# EAGLE board AnalogI_3_3V_LevelShift (EAGLE 7.6.0)
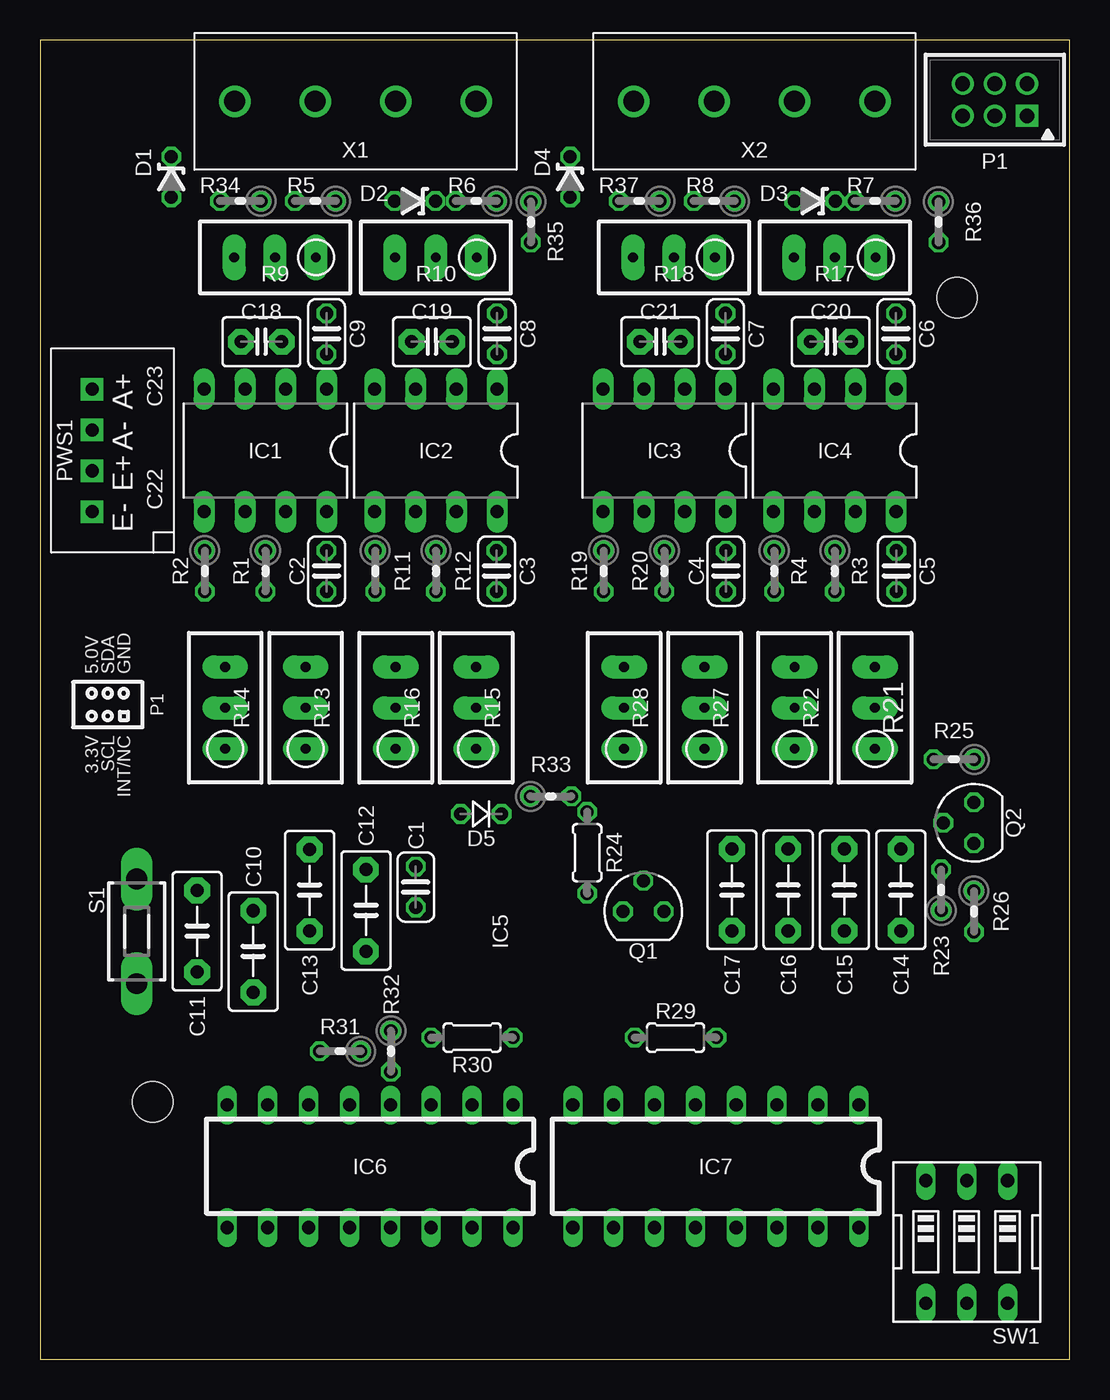
[diagram p0: board, top side]
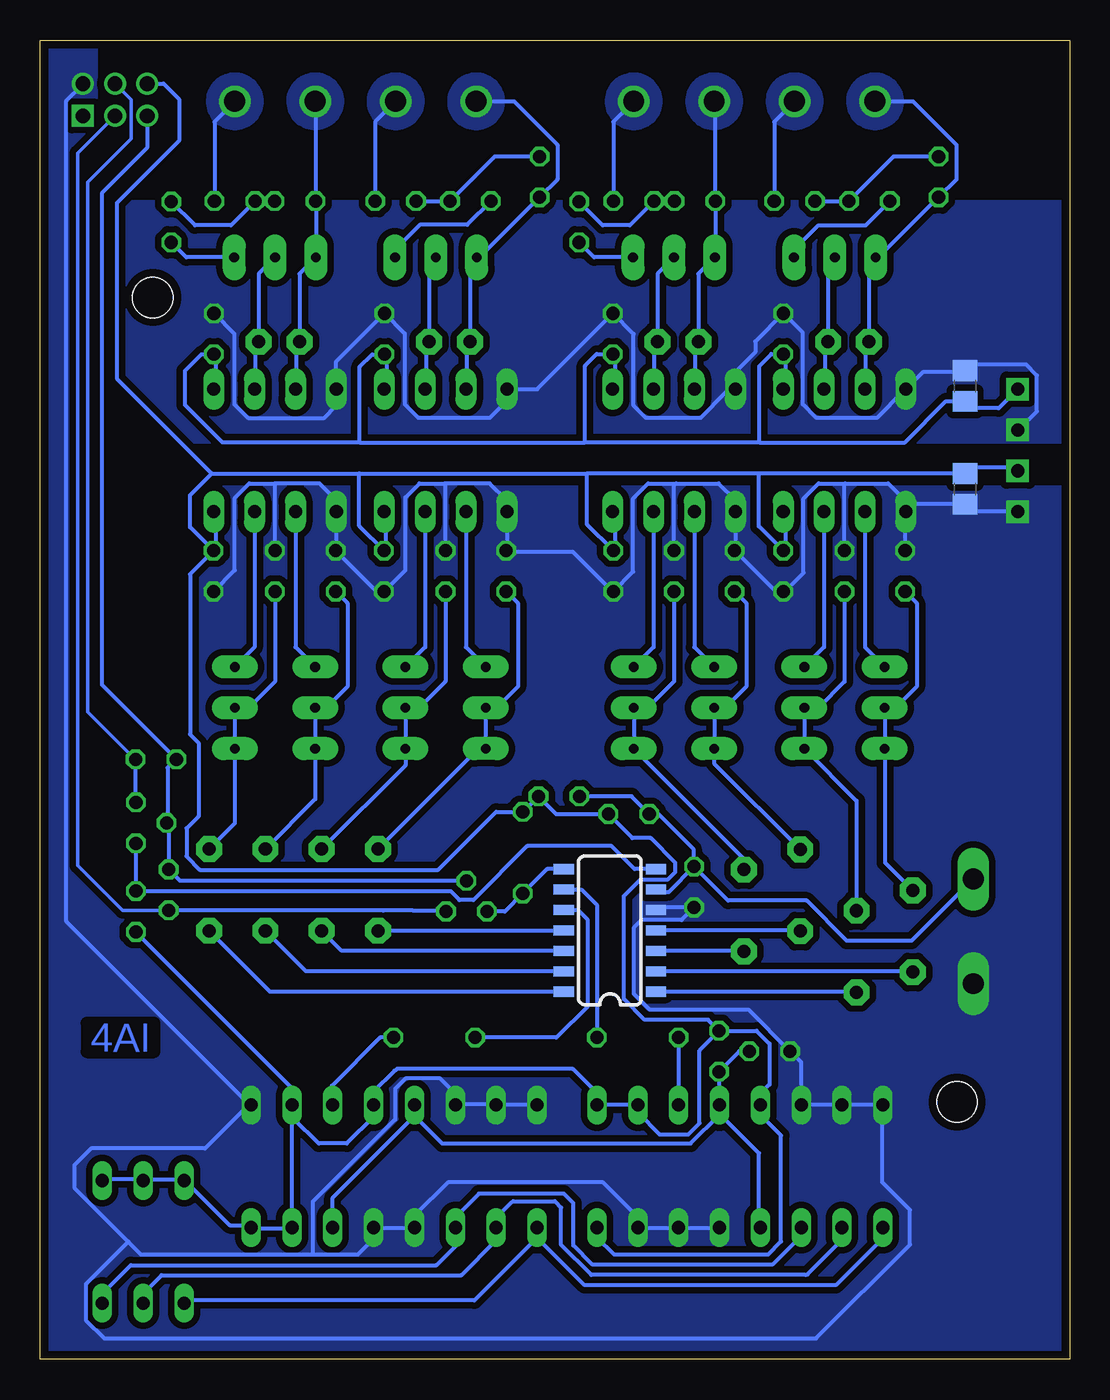
[diagram p1: board, bottom side, seen from below]

Size 64 x 82 mm. Coordinates in mm from the lower left corner, seen from the top.
Outline: 0,0 64,0 64,82 0,82 0,0
Copper layers (1*16): Top 0.035mm / dielectric 1.6mm / Bottom 0.035mm
Design rules "Elecrow": minimum track width 6mil, minimum drill 12mil, track to track 6mil, track to pad 6mil, pad to pad 6mil, via to via 8mil, smd to smd 0mil, copper to edge 20mil, drill to drill 10mil, minimum pad ring 6mil, minimum via ring 6mil, stop-mask expansion 0mil, vias tented up to drill 100mil, thermal gap 10mil
Holes 2.5 mm at 7,16 57,66

## Footprints (pad centres in the part's own frame; a part is rotated, then mirrored left to right if it is on the bottom)
C025-024X044 = drill 0.813 octagon: 1 -1.27,0; 2 1.27,0
C5B3 = drill 0.813 pad 1.6 octagon: 1 -2.54,0; 2 2.54,0
C2.5-3 = drill 0.813 pad 1.6 octagon: 1 -1.27,0; 2 1.27,0
C0805 = smd 1.3 x 1.5: 1 -0.95,0; 2 0.95,0
ZDIO-2.5 = drill 0.813 octagon: A 1.27,0; C -1.27,0
DO35-2V = drill 0.813 octagon: A 1.27,0; C -1.27,0
DIL08 = drill 0.813 pad 1.3 long: 1 -3.81,-3.81; 2 -1.27,-3.81; 3 1.27,-3.81; 4 3.81,-3.81; 5 3.81,3.81; 6 1.27,3.81; 7 -1.27,3.81; 8 -3.81,3.81
14LDSOIC = smd 1.27 x 0.635: 1 -2.87,3.81; 2 -2.87,2.54; 3 -2.87,1.27; 4 -2.87,0; 5 -2.87,-1.27; 6 -2.87,-2.54; 7 -2.87,-3.81; 8 2.87,-3.81; 9 2.87,-2.54; 10 2.87,-1.27; 11 2.87,0; 12 2.87,1.27; 13 2.87,2.54; 14 2.87,3.81
DIL16 = drill 0.813 long: 1 -8.89,-3.81; 2 -6.35,-3.81; 3 -3.81,-3.81; 4 -1.27,-3.81; 5 1.27,-3.81; 6 3.81,-3.81; 7 6.35,-3.81; 8 8.89,-3.81; 9 8.89,3.81; 10 6.35,3.81; 11 3.81,3.81; 12 1.27,3.81; 13 -1.27,3.81; 14 -3.81,3.81; 15 -6.35,3.81; 16 -8.89,3.81
DF11-06DP-2DSA = drill 0.914 square: 1 2,-1 | drill 0.914: 2 2,1; 3 0,-1; 4 0,1; 5 -2,-1; 6 -2,1
TMEXXXXS = drill 0.813 pad 1.397 square: 1 -3.81,1.27; 2 -1.27,1.27; 3 1.27,1.27; 4 3.81,1.27
SOT54E = drill 0.813 octagon: D -1.27,0; G 0,1.905; S 1.27,0
0204V = drill 0.813 octagon: 1 -1.27,0; 2 1.27,0
RTRIM3296W = drill 0.61 pad 1.422 long: 1 0,-2.54; 2 0,0; 3 0,2.54
0204/5 = drill 0.813 octagon: 1 -2.54,0; 2 2.54,0
DTS-3 = drill 1.3 long: 1 -3.25,0; 2 3.25,0
EDG-03 = drill 0.813 long: 1 -2.54,-3.81; 2 0,-3.81; 3 2.54,-3.81; 4 2.54,3.81; 5 0,3.81; 6 -2.54,3.81
691131710004 = drill 1.3: 1 -7.5,0; 2 -2.5,0; 3 2.5,0; 4 7.5,0

## Placement (x,y rotation side)
C1  100nF  [C025-024X044]  23.35,29.36 270 top
C2  100nF  [C025-024X044]  17.8,49 90 top
C3  100nF  [C025-024X044]  28.37,49 90 top
C4  100nF  [C025-024X044]  42.63,49 90 top
C5  100nF  [C025-024X044]  53.23,49 90 top
C6  100nF  [C025-024X044]  53.2,63.75 90 top
C7  100nF  [C025-024X044]  42.6,63.75 90 top
C8  100nF  [C025-024X044]  28.4,63.75 90 top
C9  100nF  [C025-024X044]  17.8,63.75 90 top
C10  100nF  [C5B3]  13.25,25.35 90 top
C11  100nF  [C5B3]  9.75,26.61 90 top
C12  100nF  [C5B3]  20.25,27.9 90 top
C13  100nF  [C5B3]  16.75,29.16 90 top
C14  100nF  [C5B3]  53.5,29.18 270 top
C15  100nF  [C5B3]  50,29.18 270 top
C16  100nF  [C5B3]  46.5,29.18 270 top
C17  100nF  [C5B3]  43,29.18 270 top
C18  10nF  [C2.5-3]  13.75,63.25 0 top
C19  10nF  [C2.5-3]  24.35,63.25 0 top
C20  10nF  [C2.5-3]  49.15,63.25 0 top
C21  10nF  [C2.5-3]  38.55,63.25 0 top
C22  4.7uF  [C0805]  6.5,54.1 270 bottom
C23  10uF  [C0805]  6.5,60.5 270 bottom
D1  10V  [ZDIO-2.5]  8.15,73.5 270 top
D2  10V  [ZDIO-2.5]  23.3,72 180 top
D3  10V  [ZDIO-2.5]  48.16,72 180 top
D4  10V  [ZDIO-2.5]  32.95,73.5 270 top
D5  1N4148DO35-2V  [DO35-2V]  27.41,33.9 180 top
IC1  HCPL-7800  [DIL08]  14,56.5 180 top
IC2  HCPL-7800  [DIL08]  24.6,56.5 180 top
IC3  HCPL-7800  [DIL08]  38.8,56.5 180 top
IC4  HCPL-7800  [DIL08]  49.4,56.5 180 top
IC5  MCP3424SOIC  [14LDSOIC]  28.59,26.66 180 bottom
IC6  74HC4051_MUXN  [DIL16]  20.5,12 180 top
IC7  74HC4051_MUXN  [DIL16]  42,12 180 top
P1  DF11-06-2DSA  [DF11-06DP-2DSA]  59.35,78.3 0 top
PWS1  TME_0505S  [TMEXXXXS]  4.5,56.5 90 top
Q1  BS170  [SOT54E]  37.5,27.84 0 top
Q2  BS170  [SOT54E]  58.05,33.35 90 top
R1  1K  [0204V]  14,49 270 top
R2  1K  [0204V]  10.23,49 270 top
R3  1K  [0204V]  49.4,49 270 top
R4  1K  [0204V]  45.63,49 270 top
R5  1K2  [0204V]  17.1,72 180 top
R6  1K2  [0204V]  27.1,72 180 top
R7  1K2  [0204V]  51.9,72 180 top
R8  1K2  [0204V]  41.9,72 180 top
R9  1K  [RTRIM3296W]  14.6,68.5 90 top
R10  1K  [RTRIM3296W]  24.6,68.5 90 top
R11  1K  [0204V]  20.83,49 270 top
R12  1K  [0204V]  24.6,49 270 top
R13  1K  [RTRIM3296W]  16.5,40.5 0 top
R14  1K  [RTRIM3296W]  11.5,40.5 0 top
R15  1K  [RTRIM3296W]  27.1,40.5 0 top
R16  1K  [RTRIM3296W]  22.1,40.5 0 top
R17  1K  [RTRIM3296W]  49.4,68.5 90 top
R18  1K  [RTRIM3296W]  39.4,68.5 90 top
R19  1K  [0204V]  35.03,49 270 top
R20  1K  [0204V]  38.8,49 270 top
R21  1K  [RTRIM3296W]  51.9,40.5 0 top
R22  1K  [RTRIM3296W]  46.9,40.5 0 top
R23  1K  [0204V]  56.01,29.18 90 top
R24  1K  [0204/5]  34,31.49 270 top
R25  1K  [0204V]  56.8,37.3 180 top
R26  1K  [0204V]  58.05,27.84 270 top
R27  1K  [RTRIM3296W]  41.3,40.5 0 top
R28  1K  [RTRIM3296W]  36.3,40.5 0 top
R29  1K  [0204/5]  39.5,20 0 top
R30  1K  [0204/5]  26.85,20 180 top
R31  4K7  [0204V]  18.65,19.15 180 top
R32  4K7  [0204V]  21.8,19.15 270 top
R33  1K  [0204V]  31.75,35 0 top
R34  10K  [0204V]  12.45,72 180 top
R35  10K  [0204V]  30.5,70.7 270 top
R36  10K  [0204V]  55.85,70.7 270 top
R37  10K  [0204V]  37.25,72 180 top
S1  DTS-3  [DTS-3]  6,26.6 270 top
SW1  [EDG-03]  57.6,7.3 180 top
X1  691131710004  [691131710004]  19.6,78.2 0 top
X2  691131710004  [691131710004]  44.4,78.2 0 top

## Library data of the parts
C1-C9 C22 C23 R1-R8 R11 R12 R19 R20 R29-R37 = rcl
C10-C21 = capacitor-wima
D1-D5 = diode
IC1-IC4 = avago; MPN: HCPL-7800A#500; OC_FARNELL: 459446; OC_NEWARK: 05M6395
IC5 = mcp3424
IC6 IC7 = SparkFun-AnalogIC
P1 = con-hirose-df11; OC_FARNELL: unknown
PWS1 = traco-electronic; MPN: TME 0505S; OC_FARNELL: 1007538; OC_NEWARK: 51R5321
Q1 Q2 = transistor-small-signal; MF: ON SEMICONDUCTOR; MPN: BS170G; OC_FARNELL: 9556192
R9 R10 R13-R18 R21 R22 R27 R28 = resistor
R23-R26 = rcl; OC_FARNELL: unknown
S1 = switch-tact
SW1 = special
X1 X2 = con-wuerth

## Nets
+3V3: P1.5 Q1.G Q2.G R23.2 R25.2
+5V: C2.2 C3.2 C4.2 C5.2 C22.1 D5.C IC1.8 IC2.8 IC3.8 IC4.8 IC6.1 IC6.2 IC6.5 IC6.16 IC7.2 IC7.4 IC7.15 IC7.16 P1.6 PWS1.2 R24.1 R26.2 R32.1 R33.2 SW1.1 SW1.2 SW1.3
GND: C1.2 C2.1 C3.1 C4.1 C5.1 C22.2 IC1.5 IC2.5 IC3.5 IC4.5 IC5.5 IC6.6 IC6.7 IC6.8 IC6.13 IC6.14 IC6.15 IC7.1 IC7.6 IC7.7 IC7.8 IC7.12 IC7.13 P1.2 PWS1.1 R1.1 R2.1 R3.1 R4.1 R11.1 R12.1 R19.1 R20.1 R31.2 S1.2
N$1: C14.2 IC5.14
N$2: C15.2 IC5.13
N$3: C16.2 IC5.12
N$4: C17.2 IC5.11
N$5: C19.1 D2.A IC2.3 R10.3 X1.3
N$6: R5.1 X1.2
N$7: D1.C R5.2 R34.1
N$8: C6.1 C7.1 C8.1 C9.1 C23.2 IC1.1 IC2.1 IC3.1 IC4.1 PWS1.4
N$9: IC5.10 R29.1
N$10: IC5.9 R30.1
N$11: C18.2 IC1.2 R9.2
N$12: C19.2 IC2.2 R10.2
N$13: C10.1 IC5.1
N$14: C20.2 IC4.2 R17.2
N$15: C11.1 IC5.2
N$16: C21.1 D4.A IC3.3 R18.3 X2.1
N$17: C12.1 IC5.3
N$18: C12.2 R12.2 R15.1 R15.2
N$19: C21.2 IC3.2 R18.2
N$20: R6.1 X1.4
N$21: D2.C R6.2 R35.1
N$22: IC1.7 R13.3
N$23: IC1.6 R14.3
N$24: C10.2 R1.2 R13.1 R13.2
N$25: IC2.6 R16.3
N$26: IC2.7 R15.3
N$27: C11.2 R2.2 R14.1 R14.2
N$28: R7.1 X2.4
N$29: C13.2 R11.2 R16.1 R16.2
N$30: C18.1 D1.A IC1.3 R9.3 X1.1
N$31: C13.1 IC5.4
N$32: D3.C R7.2 R36.1
N$33: C6.2 C7.2 C8.2 C9.2 C23.1 IC1.4 IC2.4 IC3.4 IC4.4 PWS1.3
N$34: R8.1 X2.2
N$35: D4.C R8.2 R37.1
N$36: IC7.3 R29.2
N$37: IC6.9 IC7.9 SW1.4
N$38: IC4.7 R21.3
N$39: IC4.6 R22.3
N$40: C15.1 R4.2 R22.1 R22.2
N$41: C20.1 D3.A IC4.3 R17.3 X2.3
N$42: C14.1 R3.2 R21.1 R21.2
N$43: IC3.6 R28.3
N$44: IC3.7 R27.3
N$45: C17.1 R19.2 R28.1 R28.2
N$46: C16.1 R20.2 R27.1 R27.2
N$47: IC6.10 IC7.10 SW1.5
N$48: IC6.11 IC7.11 SW1.6
N$49: IC6.3 R30.2
N$51: IC6.4 IC6.12 IC7.5 IC7.14 R31.1 R32.2
N$52: C1.1 D5.A IC5.6 R33.1 S1.1
N$53: R9.1 R34.2
N$54: R10.1 R35.2
N$55: R17.1 R36.2
N$56: R18.1 R37.2
N$58: IC5.8 Q1.D R24.2
N$61: IC5.7 Q2.D R26.1
N$69: P1.4 Q2.S R25.1
N$71: P1.3 Q1.S R23.1

## Tracks (layer width: path | path; a pad name or v marks a point on that pad's centre or on a via)
+3V3
  Bottom 0.203: Q2.G 56.12,33.36 56.01,33.36
  Bottom 0.254: R25.2 55.68,37.19 56.08,36.78 56.08,33.53 56.01,33.45 56.01,33.36 R23.2 | 55.47,37.39 R25.2 | 56.03,30.45 R23.2 | Q1.G 55.3,29.75 R23.2 | R25.2 60.17,41.94 60.17,72.49 57.35,75.31 P1.5
+5V
  Bottom 0.254: 19.32,55.07 30,55.07 | 53.33,55.07 44.16,55.07 | 44.16,55.07 30,55.07 | 19.32,55.07 19.32,51.79 C2.2 17.67,50.43 17.67,52.03 17.61,52.49 IC1.8 | 30,55.07 30,51.9 C3.2 28.37,50.47 28.25,50.59 28.25,52.35 IC2.8 | 44.16,55.07 44.16,51.8 C4.2 42.51,50.39 42.51,52.59 IC3.8 | IC6.1 29.26,15.85 27.03,15.85 IC6.2 26.85,15.34 25.49,13.98 23.74,13.98 23.72,13.96 23.01,14.67 23.01,19.19 21.8,20.4 R32.1 | SW1.1 59.94,11.18 57.71,11.18 SW1.2 57.51,11.18 55.07,11.18 SW1.3 54.86,10.97 52.22,8.33 51,8.33 IC7.16 50.8,8.13 48.36,8.13 IC7.15 48.35,14.77 48.2,14.92 | IC4.8 53.1,52.58 53.1,50.4 C5.2 | R32.1 19.47,20.42 18.66,19.61 18.66,17.09 19.22,16.53 IC6.5 | 29.26,8.13 IC6.16 29.37,8.17 29.37,7.56 28.31,6.5 18.77,6.5 17.95,7.32 17.95,13.91 19.22,15.18 IC6.5 | 19.1,15.65 IC6.5 | IC7.4 43.28,15.65 43.28,15.07 44.94,13.41 46.69,13.41 48.2,14.92 | 48.16,15.65 IC7.2 | 29.46,15.85 IC6.1 | 43.28,15.85 IC7.4 | 53.24,50.19 C5.2 | IC7.2 48.36,15.85 48.36,16.88 R26.2 | IC7.4 43.29,15.83 43.29,16.62 41.97,17.94 41.95,17.94 41.84,18.05 30.89,18.05 29.4,16.56 IC6.1 | 48.2,14.92 48.32,15.04 48.32,15.78 IC7.2 | P1.6 56.33,79.3 55.37,78.34 55.37,75.74 59.23,71.88 59.23,60.97 53.33,55.07 | C5.2 54.69,51.73 54.69,53.72 53.34,55.07 53.33,55.07 | R32.1 22.48,21.1 26.42,21.1 27.72,22.4 27.72,28.79 26.67,29.84 24.96,29.84 24.51,30.29 24.51,30.87 26.04,32.4 27.18,32.4 D5.C 31.92,33.9 R33.2 R24.1 35.66,34.03 39.26,30.43 54.08,30.43 54.91,31.26 54.91,33 54.16,33.75 54.16,38.32 54.69,38.85 54.69,48.81 C5.2 | 19.32,55.07 6.52,55.07 C22.1 6.12,55.44 3.44,55.44 PWS1.2
GND
  Bottom 0.203: 47.05,6.62 47.06,6.62 47.06,6.5
  Bottom 0.254: 10.23,52.69 R2.1 | IC2.5 20.79,50.31 R11.1 20.73,50.19 18.29,47.75 17.88,47.75 C2.1 17.68,47.75 16.55,48.88 16.55,53.52 15.62,54.45 13.96,54.45 | 20.93,52.83 IC2.5 | 28.25,47.75 C3.1 | IC6.8 11.79,15.85 14.02,15.85 IC6.7 | IC7.8 33.12,15.85 35.56,15.85 IC7.7 35.76,15.85 38,15.85 IC7.6 | C3.1 27.14,48.96 27.14,53.52 26.21,54.45 24.47,54.45 | 24.47,54.45 21.83,54.45 20.82,53.44 20.82,52.72 IC2.5 | R12.1 24.6,54.32 24.47,54.45 | 13.96,54.45 11.28,54.45 10.24,53.41 10.24,52.74 | R1.1 14,54.41 13.96,54.45 | 14.13,15.83 IC6.7 | 43.29,8.83 43.29,8.74 | 43.29,8.74 43.29,8.21 | 43.27,8.7 43.26,8.71 43.28,8.74 | 21.74,8.33 IC6.13 21.98,8.19 24.21,8.19 IC6.14 24.38,8.13 26.82,8.13 IC6.15 | IC7.12 40.78,8.19 43.02,8.19 IC7.13 | 25.36,27.93 IC5.5 25.45,27.93 25.29,28.09 C1.2 | IC6.7 IC6.6 | 43.28,8.74 43.29,8.74 | 43.28,8.74 IC7.13 | 38.85,54.45 40.43,54.45 41.3,53.58 41.3,49.06 C4.1 43.09,47.73 R4.1 45.59,50.31 IC4.5 45.59,53.4 46.64,54.45 49.4,54.45 | 38.85,54.45 36.06,54.45 34.99,53.38 IC3.5 34.99,50.31 R19.1 34.95,50.19 30.89,50.19 28.45,47.75 C3.1 | R20.1 38.8,54.4 38.85,54.45 | C5.1 51.91,49.05 51.91,53.55 51.01,54.45 49.4,54.45 | R3.1 49.4,54.45 | IC6.6 16.69,18.46 R31.2 19.98,21.75 26.12,21.75 27.11,22.74 27.11,26.81 26.61,27.31 24.13,27.31 C1.2 | 28.45,47.55 C3.1 | 23.16,28.25 C1.2 | P1.2 61.37,79.25 62.38,78.23 62.38,27.23 51,15.85 IC7.1 51.05,15.81 53.75,13.11 60.84,13.11 61.88,12.07 61.88,10.67 58.52,7.32 | 27.03,8.33 IC6.15 | 40.64,8.33 IC7.12 | 38.2,15.85 IC7.6 | 43.28,8.13 IC7.13 | 16.87,15.65 IC6.6 | 58.52,7.32 57.71,6.5 47.06,6.5 44.27,6.5 43.28,7.49 IC7.13 | IC7.6 38.17,15.83 38.17,16.5 39.13,17.46 41.29,17.46 41.93,16.82 41.93,14.91 47.05,9.79 47.05,6.62 47.05,6.6
  Bottom 0.254: 58.52,7.32 61.16,4.67 61.16,2.44 60.02,1.29 15.76,1.29 9.93,7.12 9.93,9.28 11.66,11.01 11.66,15.54 IC6.8 | 11.58,15.65 IC6.8 | IC7.12 40.72,8.94 38.66,11 29.01,11 26.85,8.84 IC6.15 | C3.1 | PWS1.1 3.25,52.71 6.06,52.71 C22.2 9.73,53.15 IC1.5
  pour Bottom (isolate 0.406, no thermals): 0,54.25 64,54.25 64,0 0,0
  pour Bottom (isolate 0.406, no thermals): 60.5,54.25 29.5,54.25 29.5,0 64,0 64,82 60.5,82
N$1
  Bottom 0.254: IC5.14 49.71,22.85 C14.2
N$2
  Bottom 0.254: IC5.13 47.48,24.12 C15.2
N$3
  Bottom 0.254: IC5.12 45.25,25.39 C16.2
N$4
  Bottom 0.254: IC5.11 31.41,26.64 C17.2
N$5
  Bottom 0.254: X1.3 22.03,78.13 D2.A 22.03,68.53 R10.3 23.08,67.48 C19.1 23.28,63.05 23.28,61.05 23.33,61 IC2.3
  pour Bottom (no thermals): 21,77 arc180 23.2,79.4 arc180
N$6
  Bottom 0.254: X1.2 18.37,76.93 R5.1
  pour Bottom (no thermals): 16,77 arc180 18.2,79.4 arc180
N$7
  Bottom 0.254: R5.2 R34.1 10.95,74.77 D1.C
N$8
  Bottom 0.254: 28.45,60.15 IC2.1 28.41,60.76 28.28,60.89 28.28,62.36 C8.1 29.41,62.49 30.13,61.77 30.13,57 | IC3.1 42.61,60.73 42.48,60.86 42.48,62.36 C7.1 43.36,62.47 44.13,61.7 44.13,57 | 44.13,57 30.13,57 | IC1.1 17.81,60.7 17.67,60.84 17.67,62.35 C9.1 18.55,62.49 19.3,61.74 19.3,57 | IC4.1 53.21,60.79 53.09,60.91 53.09,62.37 C6.1 53.97,62.48 55,61.45 55,59.33 52.67,57 44.13,57 | 19.3,57 30.13,57 | 19.3,57 10.24,57 7.69,59.55 C23.2 6.4,59.55 5.98,59.13 4.41,59.13 PWS1.4
N$9
  Bottom 0.254: IC5.10 30.57,27.93 29.99,27.35 29.99,21.92 31.91,20 R29.1
N$10
  Bottom 0.254: IC5.9 30.35,29.2 29.4,28.25 R30.1
N$11
  Bottom 0.254: R9.2 15.02,68.08 C18.2 15.22,63.05 15.22,60.84 15.27,60.79 IC1.2
N$12
  Bottom 0.254: R10.2 25.62,67.48 C19.2 25.83,63.04 25.83,61.07 25.87,61.03 IC2.2
N$13
  Bottom 0.254: 25.74,22.8 IC5.1 13.29,22.85 C10.1
N$14
  Bottom 0.254: R17.2 50.42,67.48 C20.2 50.63,63.04 50.63,61.1 50.67,61.06 IC4.2
N$15
  Bottom 0.254: 25.75,24.08 IC5.2 9.8,24.12 C11.1
N$16
  Bottom 0.254: X2.1 34.54,78.2 31.84,75.5 31.84,73.34 D4.A 36.68,68.5 | 36.68,68.5 R18.3 | 36.68,68.5 37.28,67.9 C21.1 37.49,63.04 37.49,60.91 37.53,60.87 IC3.3
  pour Bottom (no thermals): 35.8,77 arc180 38,79.4 arc180
N$17
  Bottom 0.254: 25.77,25.37 IC5.3 20.28,25.39 C12.1
N$18
  Bottom 0.254: 27.1,37.94 27.1,40.38 R15.2 26.24,40.5 24.6,42.14 R12.2 | 27.1,37.94 R15.1 | 27.1,37.94 20.25,31.09 C12.2
N$19
  Bottom 0.254: R18.2 39.82,68.08 C21.2 40.02,63.05 40.02,61.08 40.07,61.03 IC3.2
N$20
  Bottom 0.254: X1.4 28.37,76.93 R6.1
  pour Bottom (no thermals): 26,77 arc180 28.2,79.4 arc180
N$21
  Bottom 0.254: D2.C R6.2 27.34,70.5 29.03,70.5 R35.1
N$22
  Bottom 0.254: IC1.7 15.27,44.27 R13.3
N$23
  Bottom 0.254: IC1.6 12.73,44.27 R14.3
N$24
  Bottom 0.254: R1.2 14,42.13 15.63,40.5 R13.2 16.49,40.46 16.49,38.02 R13.1 13.25,34.71 C10.2
N$25
  Bottom 0.254: IC2.6 23.33,44.27 R16.3
N$26
  Bottom 0.254: IC2.7 25.87,44.27 R15.3
N$27
  Bottom 0.254: R2.2 9.51,47.01 9.51,41.82 10.83,40.5 R14.2 R14.1 11.48,37.94 11.48,30.88 C11.2
N$28
  Bottom 0.254: X2.4 53.17,76.93 R7.1
  pour Bottom (no thermals): 50.8,77 arc180 53,79.4 arc180
N$29
  Bottom 0.254: R16.1 22.09,38 22.09,40.44 R16.2 21.42,40.5 20.1,41.82 20.1,47 R11.2 | 22.12,37.94 R16.1 | R16.1 22.1,37.05 C13.2
N$30
  Bottom 0.254: X1.1 9.74,78.2 7.04,75.5 7.04,73.34 D1.A 11.88,68.5 R9.3 12.48,68.08 C18.1 12.69,63.04 12.69,60.96 12.73,60.92 IC1.3
  pour Bottom (no thermals): 11,77 arc180 13.2,79.4 arc180
N$31
  Bottom 0.254: 25.77,26.64 IC5.4 16.79,26.66 C13.1
N$32
  Bottom 0.254: D3.C R7.2 52.14,70.5 54.38,70.5 R36.1
N$33
  Bottom 0.254: 20.73,60.35 IC2.4 | 10.16,60.35 IC1.4 | PWS1.3 3.05,57.91 2.03,58.93 2.03,61.16 2.71,61.84 5.9,61.84 6.29,61.45 C23.1 6.58,61.37 9.13,61.37 IC1.4 | IC1.4 10.36,60.15 11.99,58.52 15.74,58.52 16.59,59.37 16.59,63.81 C9.2 19.55,63.27 19.55,62.61 20.79,61.37 IC2.4 | IC2.4 20.93,60.15 21.34,60.15 22.96,58.52 26.34,58.52 27.11,59.29 27.11,63.73 C8.2 | 35.02,60.28 35.02,59.58 36.08,58.52 40.48,58.52 41.34,59.38 41.34,63.76 C7.2 | C8.2 | C6.2 51.93,63.75 51.93,59.37 51.08,58.52 46.34,58.52 45.59,59.27 IC4.4 45.59,62.03 C7.2 | 42.62,65 C7.2 | IC3.4 33.11,60.31 C8.2
  pour Bottom (isolate 0.406, no thermals): 0,57 59,57 59,72 0,72
N$34
  Bottom 0.254: X2.2 43.17,76.93 R8.1
  pour Bottom (no thermals): 40.8,77 arc180 43,79.4 arc180
N$35
  Bottom 0.254: R8.2 R37.1 35.75,74.77 D4.C
N$36
  Bottom 0.254: R29.2 42.87,20 45.86,17.01 45.86,15.86 IC7.3
N$37
  Bottom 0.254: SW1.4 54.86,3.66 37.01,3.66 33.11,7.56 | 33.12,8.13 IC7.9 33.11,7.56 | IC6.9 11.61,7.53 14.54,4.6 30.15,4.6 33.11,7.56
N$38
  Bottom 0.254: IC4.7 50.67,44.27 R21.3
N$39
  Bottom 0.254: IC4.6 48.13,44.27 R22.3
N$40
  Bottom 0.254: R4.2 44.9,47 44.9,41.82 46.22,40.5 R22.2 R22.1 46.9,34.82 C15.1
N$41
  Bottom 0.254: 46.89,68.53 R17.3 | X2.3 D3.A 46.86,71.97 R17.3 | R17.3 47.88,67.48 C20.1 48.08,63.05 48.08,60.88 48.13,60.83 IC4.3
  pour Bottom (no thermals): 45.8,77 arc180 48,79.4 arc180
N$42
  Bottom 0.254: R3.2 49.4,42.13 51.03,40.5 R21.2 R21.1 51.9,33.32 C14.1
N$43
  Bottom 0.254: IC3.6 37.53,44.27 R28.3
N$44
  Bottom 0.254: IC3.7 40.07,44.27 R27.3
N$45
  Bottom 0.254: R28.1 R28.2 35.63,40.5 34.31,41.82 34.31,47.01 R19.2 | 36.37,38.2 R28.1 | R28.1 36.37,37.8 36.92,37.8 C17.1
N$46
  Bottom 0.254: R20.2 38.8,42.14 40.44,40.5 R27.2 R27.1 41.3,36.92 C16.1
N$47
  Bottom 0.203: 57.6,4.08 SW1.5
  Bottom 0.254: 35.56,8.33 IC7.10 | 35.76,8.13 IC7.10 | IC6.10 14.19,8.15 14.19,7.39 16.3,5.28 16.42,5.24 29.74,5.24 31.61,7.11 31.61,9.43 32,9.82 34.6,9.82 34.71,9.75 35.66,8.8 IC7.10 | IC7.10 35.66,7.39 37.82,5.23 56.45,5.23 57.6,4.08
N$48
  Bottom 0.254: 38,8.33 IC7.11 | 16.66,8.33 IC6.11 16.87,8.13 16.87,7.32 17.05,7.32 18.48,5.88 29.65,5.88 30.85,7.08 30.85,9.71 31.44,10.3 36.73,10.3 38.19,8.84 IC7.11 | 60.16,3.47 SW1.6 60.15,4.07 58.37,5.85 39.36,5.85 38.19,7.02 IC7.11
N$49
  Bottom 0.254: R30.2 IC6.3
N$51
  Bottom 0.254: R31.1 20.53,19.15 R32.2 21.8,15.84 IC6.4 | 21.54,15.44 21.74,15.65 IC6.4 | IC6.12 19.3,8.33 19.3,12.8 21.74,15.24 | 21.74,15.24 23.57,13.41 39.01,13.41 40.73,15.13 | 21.74,15.24 21.54,15.44 | 21.54,15.44 IC6.4 | 40.73,15.13 IC7.5 | IC7.14 45.81,10.05 40.73,15.13
N$52
  Bottom 0.254: IC5.6 25.45,29.2 25.28,29.03 24.94,29.03 C1.1 | 26.21,29.26 25.81,29.26 IC5.6 | IC5.6 25.81,29.06 26.21,29.06 IC5.6 | C1.1 21.23,28.51 16.35,28.51 13.85,26.01 9.84,26.01 S1.1 | C1.1 23.39,30.67 23.39,31.73 25.56,33.9 D5.A 27.24,35 R33.1
N$53
  Bottom 0.254: R9.1 17.14,68.98 15.62,70.5 12.68,70.5 R34.2
N$54
  Bottom 0.254: R10.1 29.57,68.5 R35.2
N$55
  Bottom 0.254: R17.1 54.92,68.5 R36.2
N$56
  Bottom 0.254: R37.2 37.46,70.52 40.4,70.52 41.94,68.98 R18.1
N$58
  Bottom 0.254: 31.4,30.48 IC5.8 32.48,30.47 R24.2 35.11,27.84 Q1.D
N$61
  Bottom 0.254: IC5.7 25.81,30.48 27.05,30.48 28.47,31.9 33.72,31.9 37.07,28.55 37.93,28.55 38.47,29.09 42.31,29.09 58.03,29.09 R26.1 | 58.12,29.26 R26.1 | 57.91,29.06 R26.1 | Q2.D R26.1
N$69
  Bottom 0.203: P1.4 58.34,78.29 58.34,75.88 61.04,73.18 61.04,40.25 58.09,37.3
  Bottom 0.254: 58.12,37.19 R25.1 | Q2.S 58.05,37.28 R25.1 | 58.09,37.3 R25.1
N$71
  Bottom 0.203: 55.93,27.89 R23.1 56.03,27.89 58.88,27.89 61.68,30.69 61.68,74.97 P1.3 59.28,77.27
  Bottom 0.254: R23.1 55.99,27.89 42.67,27.89 40.82,27.89 38.82,27.89 Q1.S

## Text on the board
Bottom: 4AI
tNames: 5.0V | SDA | GND | P1 | 3.3V | SCL | INT/NC